# Altium PCB AphelionGroundStation.PcbDoc (part 3 of 3)
Units mm, origin at the board's own origin, x right, y up, seen from the top; angles counter-clockwise.
Board outline 70.66 x 90.48 mm, 2 copper layers (Top Layer, Bottom Layer); 32 components, 39 nets, 122 pads, 24 vias.
Unrouted connection lines stored in the file: 1.
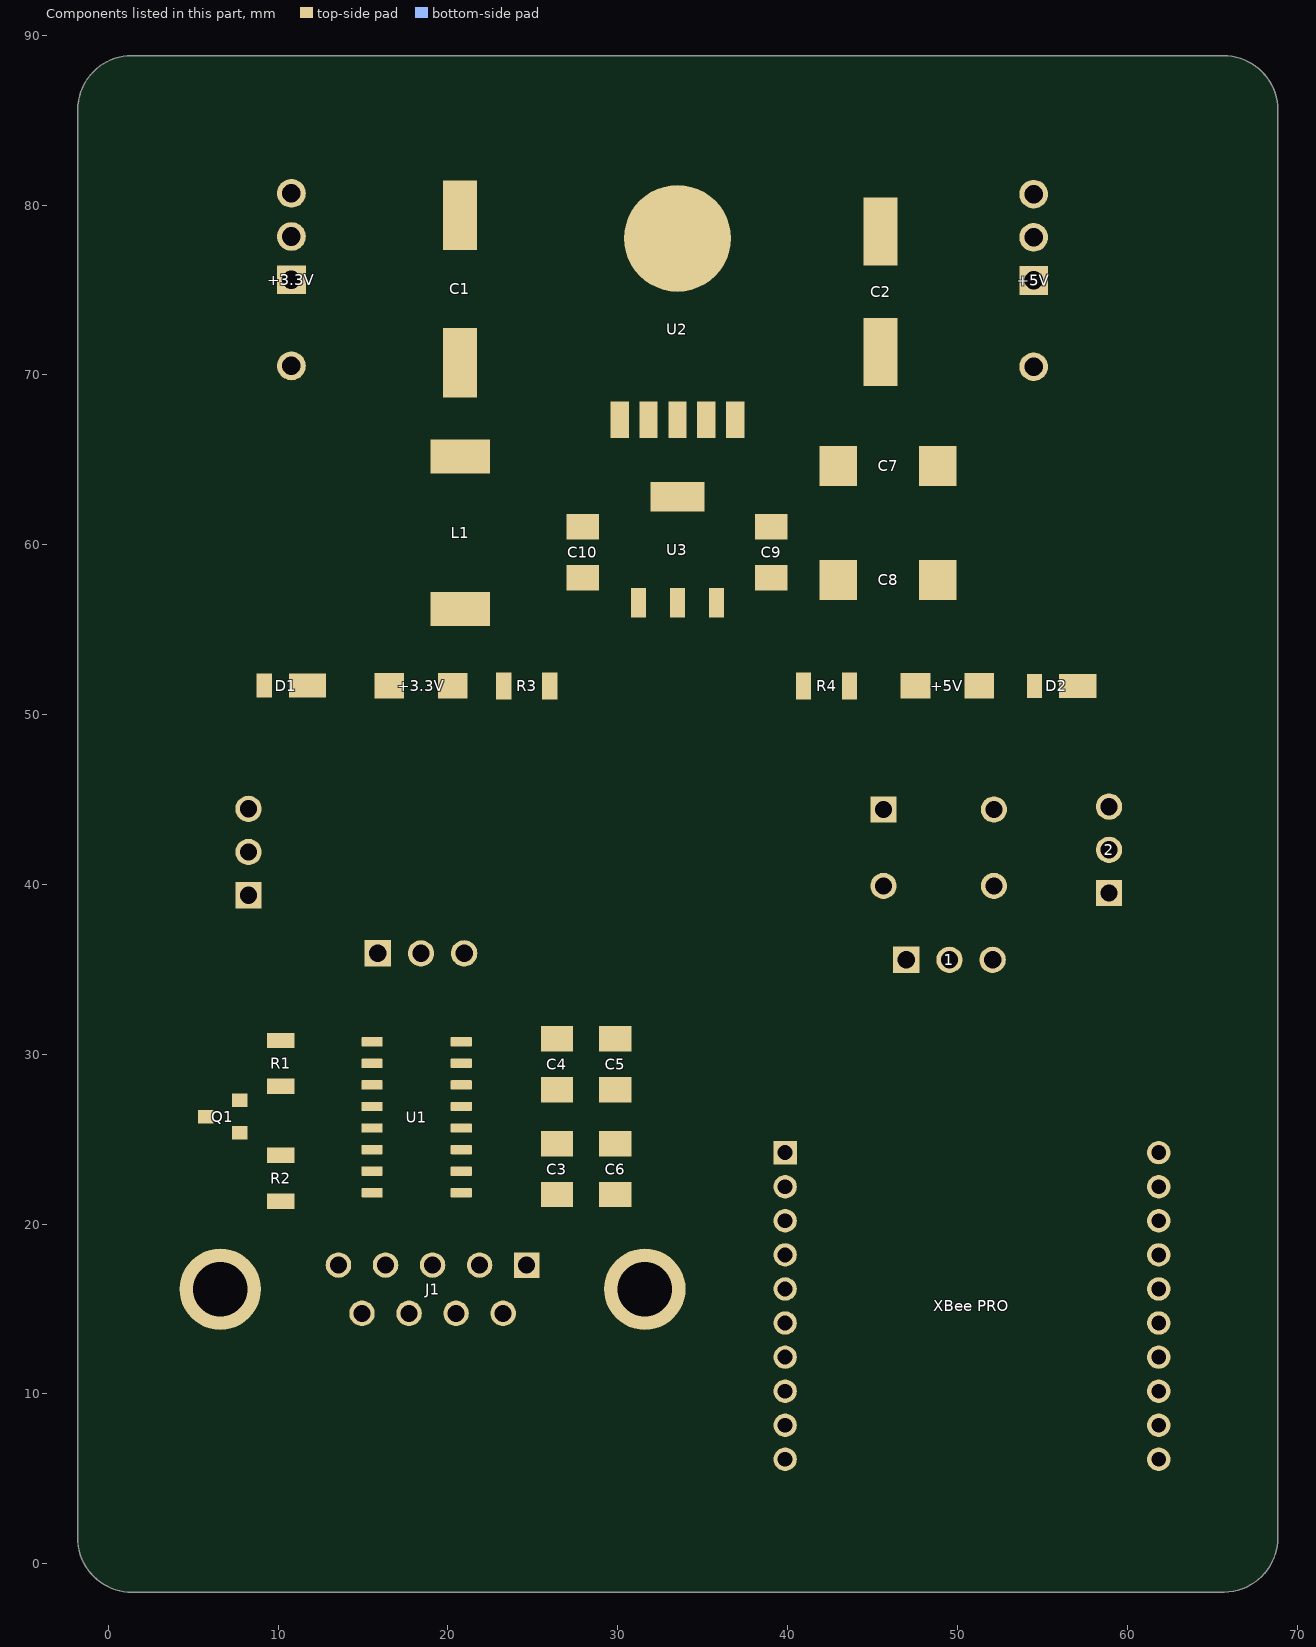
[diagram p3: the components of this part, seen from the top]

## Via types
v1: diameter 0.6, hole 0.3, Top Layer to Bottom Layer, 12 vias
v2: diameter 0.5, hole 0.3, Top Layer to Bottom Layer, 8 vias
v3: diameter 5, hole 3, Top Layer to Bottom Layer, 4 vias

## Nets (pads, with @x,y where several pads share a name; then routed paths per layer and width w, separated by ;. In a path a pad name is that pad's centre, name@x,y a point inside that pad or via, vN(x,y) a via of type N, cw(c..) or ccw(c..) an arc to the next point about the centre after c; other vN are vias at no path point) (continued)
copper on no net: (continued)
  Top Layer w0.025: 36.043,43.002 36.297,43.002 ; 36.043,43.028 36.297,43.028 ; 36.043,43.053 36.297,43.053 ; 36.043,43.078 36.297,43.078 ; 36.043,43.104 36.297,43.104 ; 36.043,43.129 36.297,43.129 ; 36.043,43.155 36.297,43.155 ; 36.043,43.18 36.297,43.18 ; 36.043,43.205 36.297,43.205 ; 36.043,43.231 36.297,43.231 ; 36.043,43.256 36.297,43.256 ; 36.043,43.282 36.322,43.282 ; 36.043,43.307 36.322,43.307 ; 36.043,43.332 36.322,43.332 ; 36.043,43.358 36.322,43.358 ; 36.043,43.383 36.373,43.383 ; 36.043,43.409 36.373,43.409 ; 36.043,43.434 36.424,43.434 ; 36.043,43.459 36.754,43.459 ; 36.043,43.485 36.754,43.485 ; 36.043,43.51 36.754,43.51 ; 36.043,43.536 36.754,43.536 ; 36.043,43.561 36.805,43.561 ; 36.043,43.586 36.805,43.586 ; 36.043,43.612 36.297,43.612 ; 36.043,43.637 36.297,43.637 ; 36.043,43.663 36.297,43.663 ; 36.043,45.466 36.068,45.466 ; 36.043,45.491 36.068,45.491 ; 36.068,46.33 36.144,46.33 ; 36.068,46.355 36.144,46.355 ; 36.068,53.111 36.144,53.111 ; 36.068,53.137 36.144,53.137 ; 36.297,44.348 36.576,44.348 ; 36.297,44.374 36.576,44.374 ; 36.297,44.399 36.576,44.399 ; 36.297,44.425 36.576,44.425 ; 36.297,44.45 36.576,44.45 ; 36.297,44.475 36.576,44.475 ; 36.297,44.501 36.576,44.501 ; 36.297,44.526 36.576,44.526 ; 36.297,44.552 36.576,44.552 ; 36.297,44.577 36.576,44.577 ; 36.297,44.602 36.576,44.602 ; 36.297,44.628 36.576,44.628 ; 36.297,44.653 36.576,44.653 ; 36.297,44.679 36.576,44.679 ; 36.297,44.704 36.576,44.704 ; 36.297,44.729 36.576,44.729 ; 36.297,44.755 36.576,44.755 ; 36.297,44.78 36.576,44.78 ; 36.297,44.806 36.576,44.806 ; 36.297,44.831 36.576,44.831 ; 36.297,44.856 36.576,44.856 ; 36.297,44.882 36.576,44.882 ; 36.297,44.907 36.576,44.907 ; 36.297,44.933 36.576,44.933 ; 36.297,44.958 36.576,44.958 ; 36.297,44.983 36.576,44.983 ; 36.297,45.009 36.576,45.009 ; 36.297,45.034 36.576,45.034 ; 36.297,45.06 36.576,45.06 ; 36.297,45.085 36.601,45.085 ; 36.297,45.11 36.601,45.11 ; 36.297,45.136 36.601,45.136 ; 36.297,45.161 36.601,45.161 ; 36.297,45.187 36.652,45.187 ; 36.297,45.212 36.703,45.212 ; 36.297,45.237 36.982,45.237 ; 36.297,45.263 36.982,45.263 ; 36.297,45.288 37.033,45.288 ; 36.297,45.314 37.084,45.314 ; 36.297,45.339 37.084,45.339 ; 36.297,45.364 36.551,45.364 ; 36.297,45.39 37.084,45.39 ; 36.297,45.415 36.576,45.415 ; 36.297,45.441 36.576,45.441 ; 36.322,43.612 36.805,43.612 ; 36.322,43.637 36.805,43.637 ; 36.322,44.323 36.576,44.323 ; 36.322,45.466 36.373,45.466 ; 36.322,45.491 36.373,45.491 ; 36.424,43.663 36.728,43.663 ; 36.474,43.434 36.525,43.434 ; 36.525,43.688 36.627,43.688 ; 36.525,45.466 36.551,45.466 ; 36.525,45.491 36.551,45.491 ; 36.551,43.434 36.703,43.434 ; 36.576,45.364 37.109,45.364 ; 36.627,43.383 36.652,43.383 ; 36.627,43.409 36.652,43.409 ; 36.627,45.415 37.059,45.415 ; 36.652,45.441 37.033,45.441 ; 36.754,45.466 36.957,45.466 ; 36.754,45.491 36.957,45.491 ; 36.805,42.901 37.084,42.901 ; 36.805,42.926 37.084,42.926 ; 36.805,42.951 37.084,42.951 ; 36.805,42.977 37.084,42.977 ; 36.805,43.002 37.744,43.002 ; 36.805,43.028 37.795,43.028 ; 36.805,43.053 37.795,43.053 ; 36.805,43.078 37.795,43.078 ; 36.805,43.104 37.795,43.104 ; 36.805,43.129 37.795,43.129 ; 36.805,43.155 37.795,43.155 ; 36.805,43.18 37.795,43.18 ; 36.805,43.205 37.744,43.205 ; 36.805,43.231 37.084,43.231 ; 36.805,43.256 37.084,43.256 ; 36.805,43.282 37.084,43.282 ; 36.805,43.307 37.084,43.307 ; 36.83,42.799 37.135,42.799 ; 36.83,42.824 37.135,42.824 ; 36.83,42.85 37.084,42.85 ; 36.83,42.875 37.084,42.875 ; 36.83,43.332 37.084,43.332 ; 36.83,43.358 37.084,43.358 ; 36.83,43.383 37.135,43.383 ; 36.83,43.409 37.135,43.409 ; 36.855,42.723 37.744,42.723 ; 36.855,42.748 37.694,42.748 ; 36.855,42.774 37.236,42.774 ; 36.855,43.434 37.186,43.434 ; 36.855,45.187 36.957,45.187 ; 36.855,45.212 36.957,45.212 ; 36.906,42.672 37.719,42.672 ; 36.906,42.697 37.744,42.697 ; 36.906,43.459 37.694,43.459 ; 36.906,43.485 37.694,43.485 ; 36.906,43.51 37.643,43.51 ; 36.906,43.536 37.643,43.536 ; 36.957,42.621 37.694,42.621 ; 36.957,42.647 37.694,42.647 ; 36.957,43.561 37.617,43.561 ; 36.982,42.596 37.643,42.596 ; 36.982,43.586 37.617,43.586 ; 37.008,42.57 37.617,42.57 ; 37.033,43.612 37.541,43.612 ; 37.033,43.637 37.541,43.637 ; 37.059,44.704 37.313,44.704 ; 37.059,44.729 37.313,44.729 ; 37.059,44.755 37.313,44.755 ; 37.059,44.78 37.313,44.78 ; 37.059,44.806 37.313,44.806 ; 37.059,44.831 37.313,44.831 ; 37.059,44.856 37.313,44.856 ; 37.059,44.882 37.313,44.882 ; 37.059,44.907 37.313,44.907 ; 37.059,44.933 37.313,44.933 ; 37.059,44.958 37.313,44.958 ; 37.059,44.983 37.313,44.983 ; 37.059,45.009 37.313,45.009 ; 37.059,45.034 37.313,45.034 ; 37.059,45.06 37.313,45.06 ; 37.084,42.545 37.516,42.545 ; 37.084,43.663 37.465,43.663 ; 37.084,44.577 37.516,44.577 ; 37.084,44.602 37.414,44.602 ; 37.084,44.628 37.414,44.628 ; 37.084,44.653 37.363,44.653 ; 37.084,44.679 37.363,44.679 ; 37.084,45.085 37.363,45.085 ; 37.084,45.11 37.363,45.11 ; 37.084,45.136 37.389,45.136 ; 37.084,45.161 37.389,45.161 ; 37.084,45.187 37.465,45.187 ; 37.135,44.526 37.998,44.526 ; 37.135,44.552 37.516,44.552 ; 37.135,45.212 37.49,45.212 ; 37.135,45.237 37.973,45.237 ; 37.135,45.263 37.973,45.263 ; 37.16,44.475 38.024,44.475 ; 37.16,44.501 38.024,44.501 ; 37.16,45.288 37.998,45.288 ; 37.186,42.52 37.465,42.52 ; 37.186,44.425 37.948,44.425 ; 37.186,44.45 37.948,44.45 ; 37.186,45.314 37.948,45.314 ; 37.186,45.339 37.948,45.339 ; 37.236,43.688 37.338,43.688 ; 37.236,44.399 37.897,44.399 ; 37.236,45.364 37.897,45.364 ; 37.236,45.39 37.897,45.39 ; 37.287,44.374 37.871,44.374 ; 37.313,45.415 37.846,45.415 ; 37.338,44.323 37.795,44.323 ; 37.338,44.348 37.795,44.348 ; 37.338,45.441 37.795,45.441 ; 37.389,42.774 37.668,42.774 ; 37.389,43.434 37.719,43.434 ; 37.414,43.383 37.744,43.383 ; 37.414,43.409 37.719,43.409 ; 37.465,43.332 37.744,43.332 ; 37.465,43.358 37.744,43.358 ; 37.465,45.466 37.719,45.466 ; 37.465,45.491 37.719,45.491 ; 37.49,43.256 37.744,43.256 ; 37.49,43.282 37.744,43.282 ; 37.49,43.307 37.744,43.307 ; 37.516,42.799 37.617,42.799 ; 37.516,42.824 37.617,42.824 ; 37.516,43.231 37.744,43.231 ; 37.516,44.298 37.668,44.298 ; 37.668,44.552 37.948,44.552 ; 37.668,44.577 37.948,44.577 ; 37.668,45.212 37.948,45.212 ; 37.719,45.187 37.948,45.187 ; 37.744,44.602 37.897,44.602 ; 37.744,44.628 37.897,44.628 ; 37.744,45.161 37.897,45.161 ; 37.77,45.136 37.871,45.136 ; 37.795,44.653 37.846,44.653 ; 38.049,44.704 38.303,44.704 ; 38.049,44.729 38.303,44.729 ; 38.049,44.755 38.303,44.755 ; 38.049,44.78 38.303,44.78 ; 38.049,44.806 38.989,44.806 ; 38.049,44.831 38.989,44.831 ; 38.049,44.856 38.989,44.856 ; 38.049,44.882 38.989,44.882 ; 38.049,44.907 38.989,44.907 ; 38.049,44.933 38.989,44.933 ; 38.049,44.958 38.989,44.958 ; 38.049,44.983 38.989,44.983 ; 38.049,45.009 38.989,45.009 ; 38.049,45.034 38.303,45.034 ; 38.049,45.06 38.303,45.06 ; 38.049,45.085 38.303,45.085 ; 38.075,44.577 38.405,44.577 ; 38.075,44.602 38.379,44.602 ; 38.075,44.628 38.379,44.628 ; 38.075,44.653 38.303,44.653 ; 38.075,44.679 38.303,44.679 ; 38.075,45.11 38.303,45.11 ; 38.075,45.136 38.354,45.136 ; 38.075,45.161 38.354,45.161 ; 38.075,45.187 38.379,45.187 ; 38.1,44.526 38.938,44.526 ; 38.1,44.552 38.405,44.552 ; 38.1,45.212 38.405,45.212 ; 38.1,45.237 38.938,45.237 ; 38.1,45.263 38.938,45.263 ; 38.151,44.475 38.964,44.475 ; 38.151,44.501 38.964,44.501 ; 38.151,45.288 38.938,45.288 ; 38.176,44.425 38.938,44.425 ; 38.176,44.45 38.938,44.45 ; 38.176,45.314 38.887,45.314 ; 38.176,45.339 38.887,45.339 ; 38.227,44.399 38.913,44.399 ; 38.227,45.364 38.837,45.364 ; 38.227,45.39 38.837,45.39 ; 38.252,44.374 38.837,44.374 ; 38.278,45.415 38.76,45.415 ; 38.278,45.441 38.735,45.441 ; 38.329,44.323 38.786,44.323 ; 38.329,44.348 38.786,44.348 ; 38.405,45.466 38.659,45.466 ; 38.405,45.491 38.659,45.491 ; 38.456,44.298 38.659,44.298 ; 38.608,45.212 38.964,45.212 ; 38.659,44.552 38.913,44.552 ; 38.659,44.577 38.913,44.577 ; 38.659,45.187 38.964,45.187 ; 38.71,44.602 38.837,44.602 ; 38.71,45.06 38.989,45.06 ; 38.71,45.085 38.989,45.085 ; 38.71,45.11 38.989,45.11 ; 38.71,45.136 38.989,45.136 ; 38.71,45.161 38.989,45.161 ; 38.735,44.628 38.837,44.628 ; 38.735,45.034 38.989,45.034
  other v3: 2.535,36.503 64.257,36.884 2.789,83.747 64.384,84.001

## Polygon pours and split planes (outlines as drawn)
GND on Top Layer "Top Layer-No Net" (solid, pour order 0): -1.792,1.489 cw(c-1.642,1.489) -1.789,1.519 cw(c-1.651,1.578) -1.801,1.578 -1.801,85.598 cw(c1.415,85.598) -0.859,87.872 cw(c1.371,85.642) 1.371,88.796 65.659,88.796 cw(c65.659,85.58) 67.933,87.854 cw(c65.703,85.624) 68.857,85.624 cw(c68.707,85.624) 68.857,85.621 68.857,1.524 cw(c65.641,1.524) 67.915,-0.75 cw(c65.685,1.48) 65.711,-1.674 cw(c65.659,-1.533) 65.659,-1.683 1.406,-1.683 cw(c1.406,1.533) -0.868,-0.741 cw(c1.362,1.489)

## Other copper
Top Layer:
  rectangle net GND: 40.085,83.392 45.085,88.392
  rectangle net +12V: 20.146,83.519 25.146,88.519
  text "Designed by ANIL EFE" at 25.931,39.726 h1
  text "Ground Control" at 28.471,37.996 h1
  text "Unit" at 31.773,36.472 h1

## Silkscreen, mask and mechanical layers (free items; w line width, h text height)
Top Overlay:
  lines w0.2: 7.62,35.306 13.843,41.529 ; 7.62,48.768 13.843,42.545 ; 9.525,35.052 15.875,41.402 ; 9.652,48.641 15.875,42.418 ; 11.684,35.179 17.907,41.402 ; 11.684,48.641 17.907,42.418 ; 18.923,41.402 25.146,35.179 ; 18.923,42.418 25.146,48.641 ; 20.574,41.402 26.797,35.179 ; 20.574,42.418 26.924,48.768 ; 22.352,41.402 28.575,35.179 ; 22.352,42.418 28.575,48.641 ; 38.481,35.433 44.704,41.656 ; 38.481,48.895 44.704,42.672 ; 39.624,50.292 59.436,50.292 59.436,53.086 39.37,53.086 39.37,50.292 39.751,50.292 ; 40.386,35.179 46.736,41.529 ; 40.513,48.768 46.736,42.545 ; 42.545,35.306 48.768,41.529 ; 42.545,48.768 48.768,42.545 ; 49.784,41.529 56.007,35.306 ; 49.784,42.545 56.007,48.768 ; 51.435,41.529 57.658,35.306 ; 51.435,42.545 57.785,48.895 ; 53.213,41.529 59.436,35.306 ; 53.213,42.545 59.436,48.768 ; 7.62,50.292 27.813,50.292 27.813,53.086 7.62,53.086 7.62,50.292
  text "+" at 16.81,87.33 h3 r180
  text "-" at 46.147,87.218 h3 r180
  text "3-30VDC" at 38.943,86.949 h2 r180
  text "POWER" at 16.129,46.228 h1
  text "POWER" at 47.244,46.228 h1
Bottom Overlay:
  text "+5V" at 57.127,44.092 h1
  text "+3.3V" at 13.947,43.965 h1
  text "+5V" at 57.127,41.552 h1
  text "+3.3V" at 13.947,41.298 h1
  text "+5V" at 57.127,39.139 h1
  text "+3.3V" at 13.947,38.631 h1
  text "DOUT" at 15.39,37.615 h1 r270
  text "CTS" at 17.93,37.615 h1 r270
  text "DIN" at 20.47,37.615 h1 r270
  text "GND" at 46.505,37.234 h1 r270
  text "GND" at 49.045,37.234 h1 r270
  text "GND" at 51.585,37.234 h1 r270
Top Solder:
  drawing of 1894 lines, arcs and shapes, not listed
  text "Designed by ANIL EFE" at 25.931,39.726 h1
  text "Ground Control" at 28.471,37.996 h1
  text "Unit" at 31.773,36.472 h1

## Text inside footprints (layer, text, board x,y; h text height)
J1: Top Overlay "9" at 12.994,14.305 h1.02; Mechanical 2 "PCB Edge" at 15.694,3.045 h1.02